# Altium PCB TC PCB.PcbDoc
Units mm, origin at the board's own origin, x right, y up, seen from the top; angles counter-clockwise.
Board outline 50 x 50 mm, 2 copper layers (Top Layer, Bottom Layer); 10 components, 16 nets, 109 pads, 0 vias.
Unrouted connection lines stored in the file: 34.
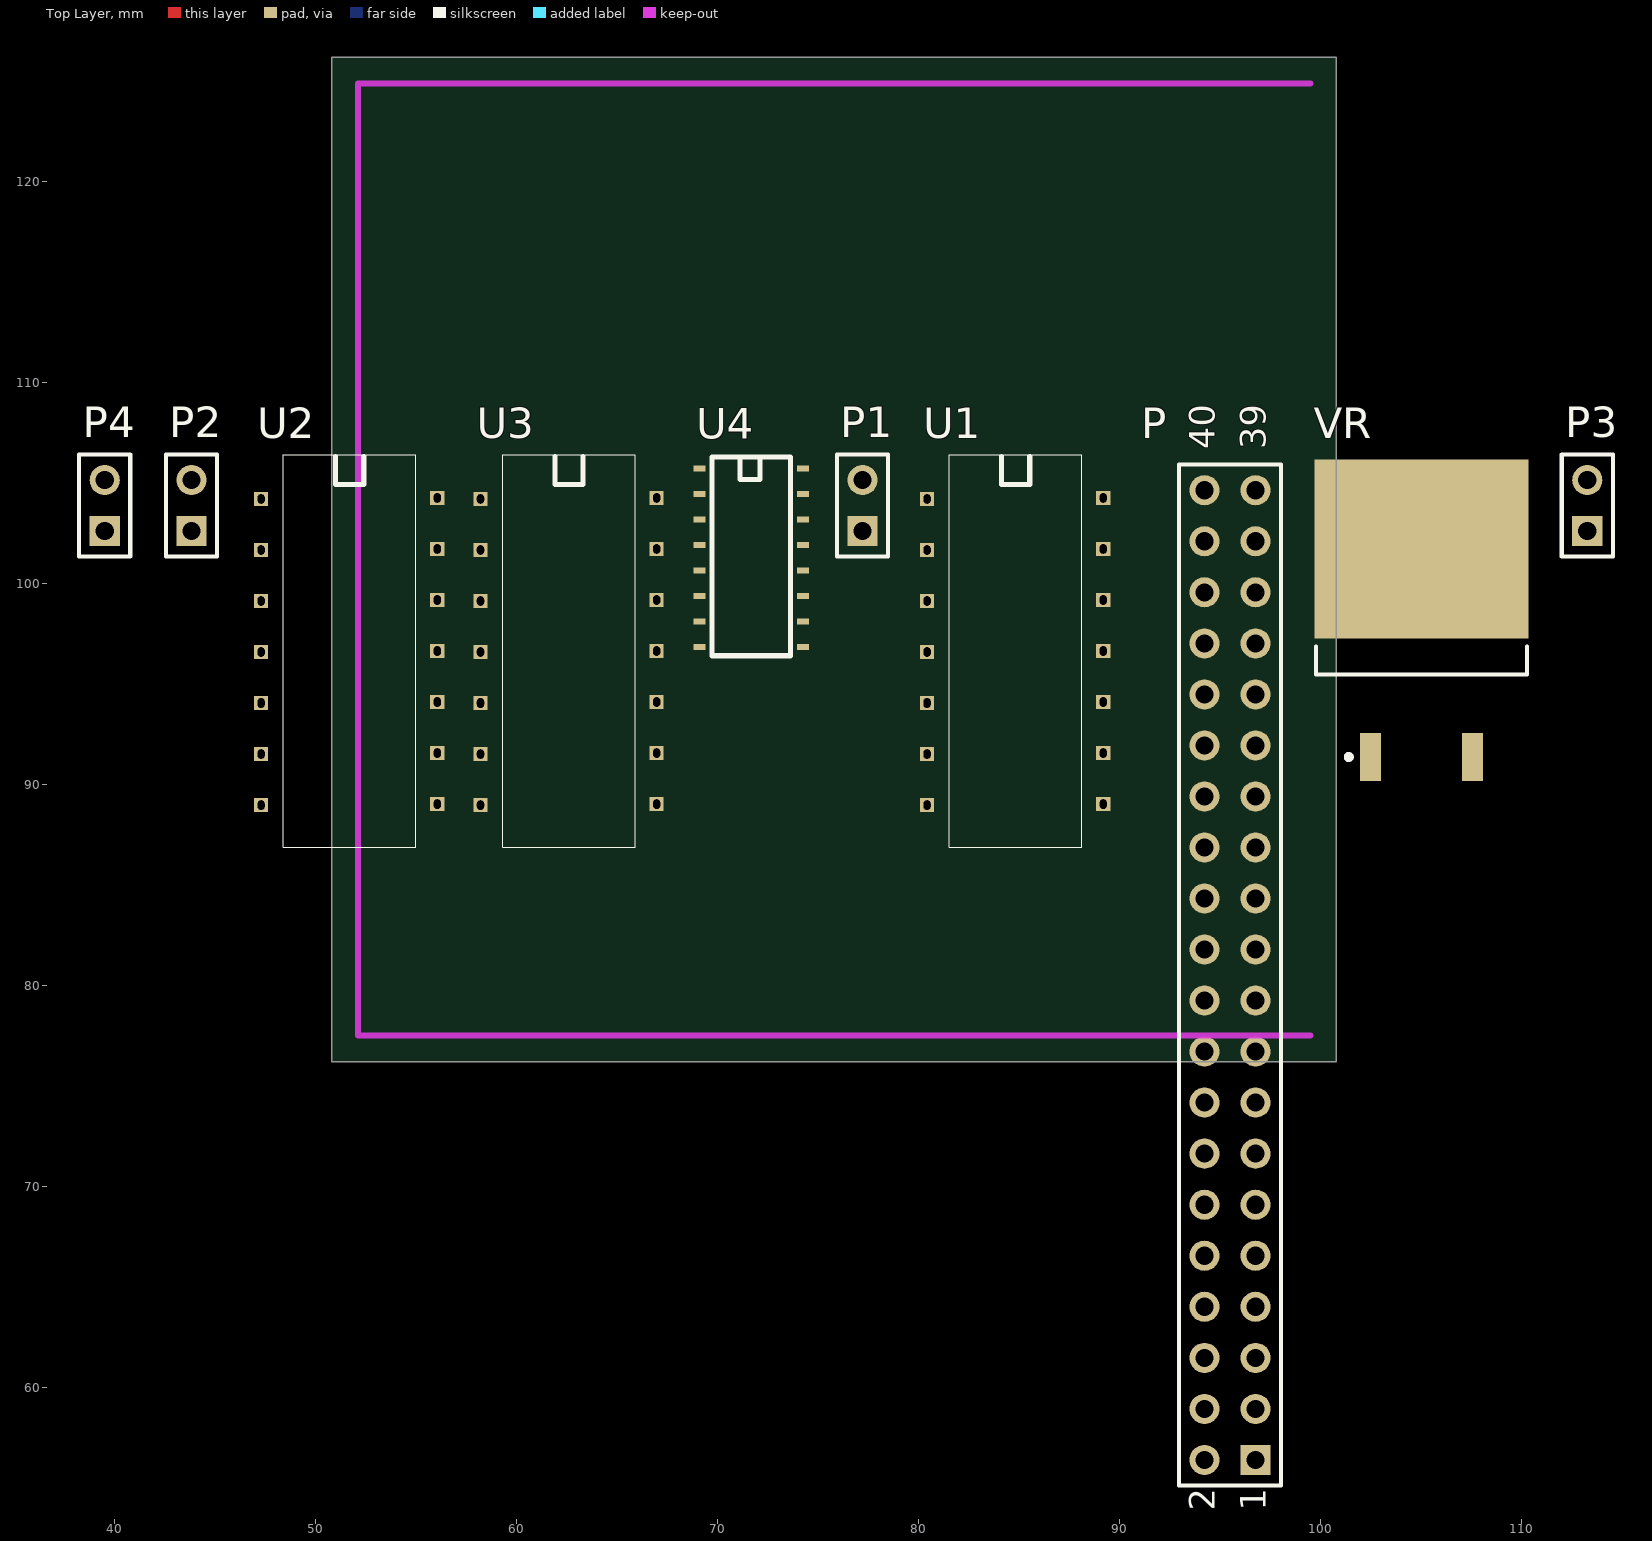
[diagram p0: Top Layer view]
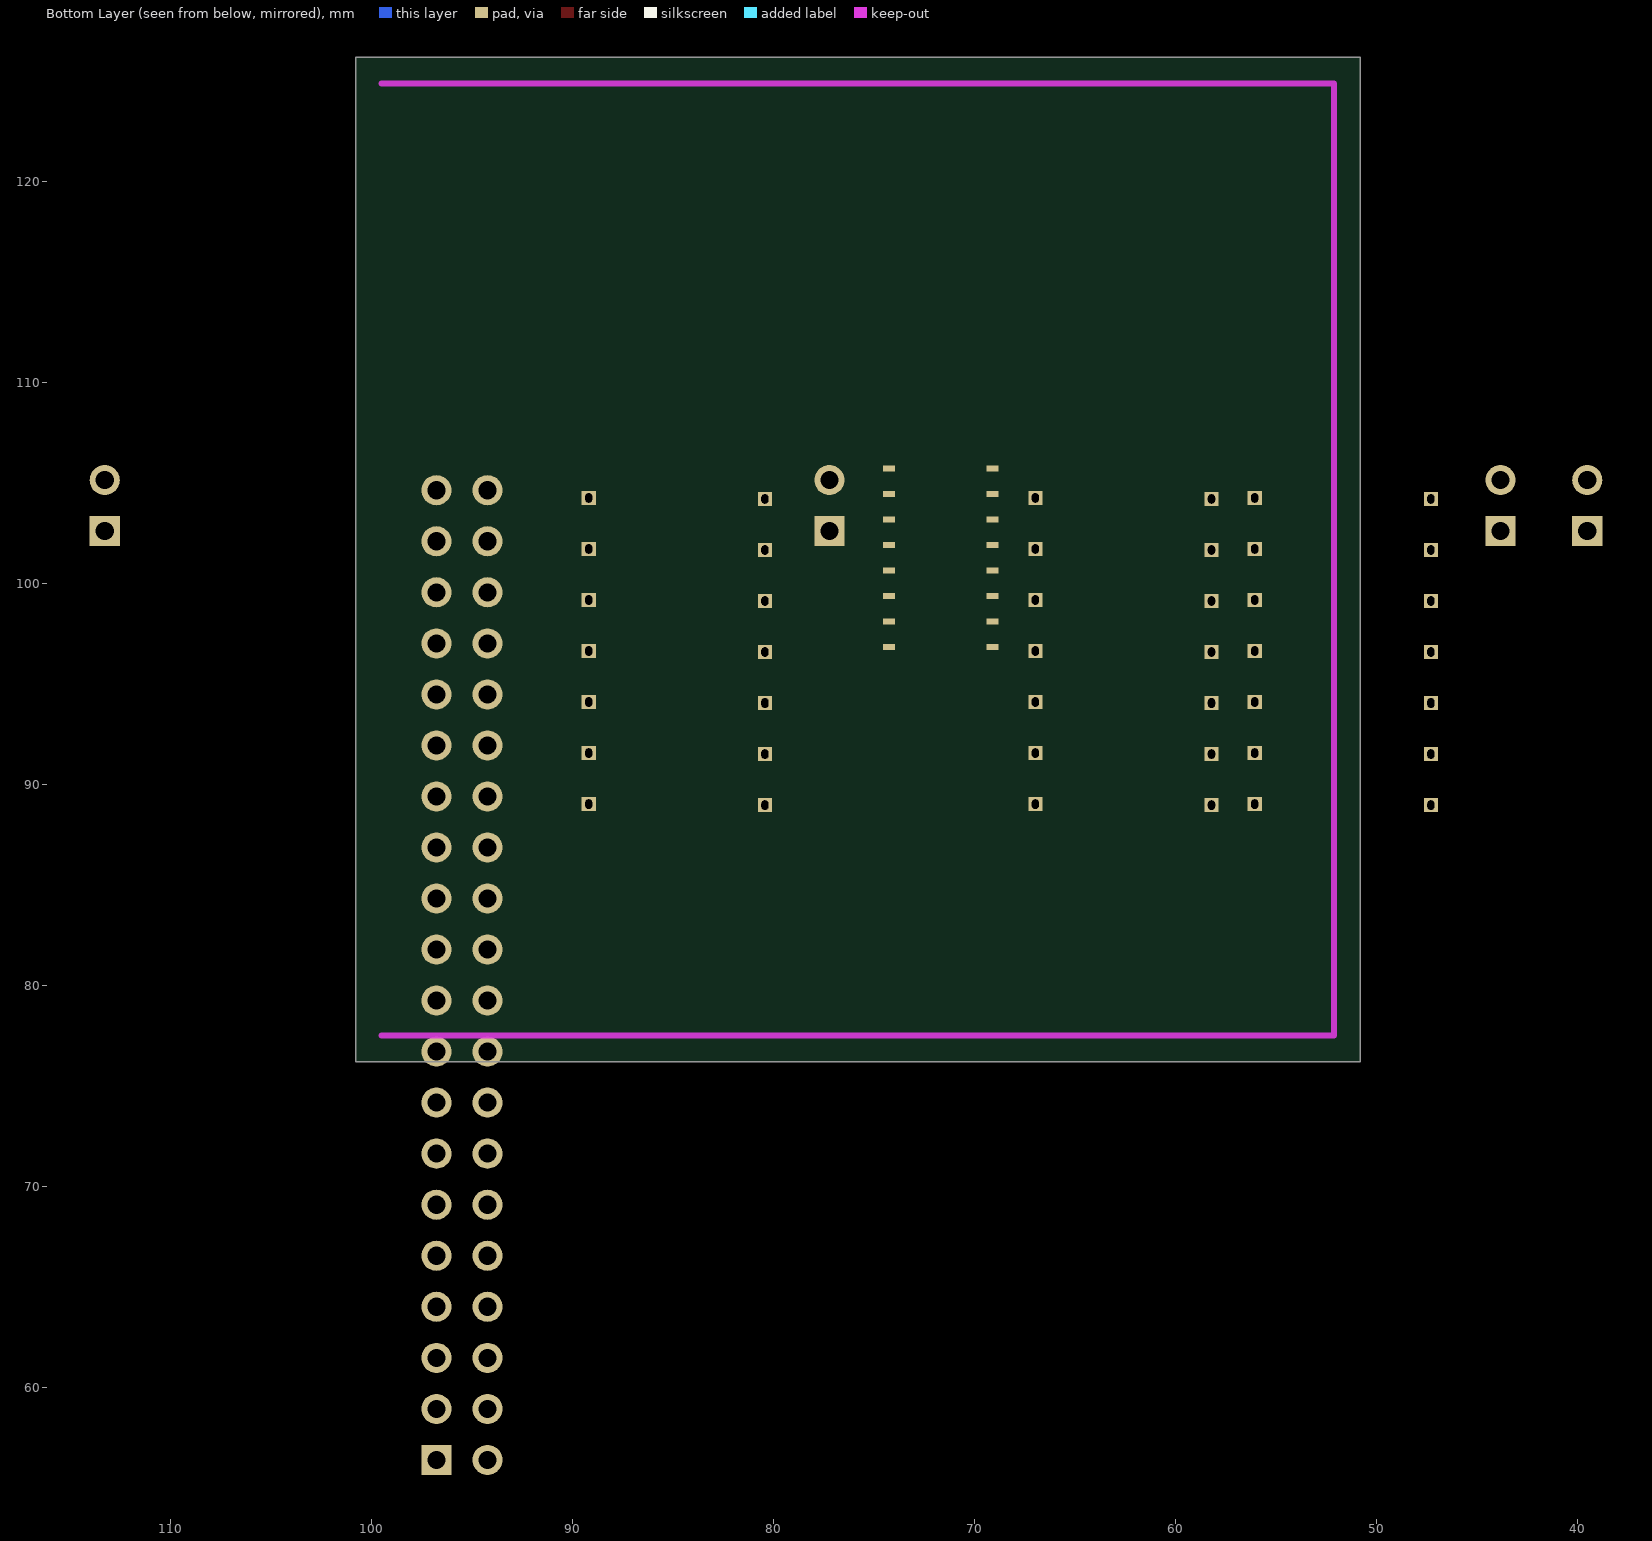
[diagram p1: Bottom Layer view, seen from below]

## Layer stack, top to bottom
Top Solder: solder mask 0.0102, Solder Resist, Dk 3.5
Top Layer: signal copper 0.0356
Dielectric 1: dielectric 0.32, FR-4, Dk 4.8
Bottom Layer: signal copper 0.0356
Bottom Solder: solder mask 0.0102, Solder Resist, Dk 3.5

## Board outline
50.8,76.2 100.8,76.2 100.8,126.2 50.8,126.2

## Design rules (kind name [scope] priority, off if disabled: settings)
Clearance [All] p1: gap=0.2
PolygonConnect [All] p1: connectstyle=Relief reliefconductorwidth=0.254 reliefentries=4 polygonreliefangle="90 Angle" airgapwidth=0.254
RoutingVias [All] p1: holewidth=0.6 width=1 viastyle="Through Hole" minholewidth=0.711 minwidth=1.27 maxholewidth=0.711 maxwidth=1.27
SolderMaskExpansion [All] p1: expansion=0.102
UnpouredPolygon [All] p1: allowunpoured=FALSE
Width [All] p1: maxlimit=0.2 minlimit=0.2 preferedwidth=0.2
29 further rules are at their usual default settings.

## Components (designator, comment, footprint, x,y, rotation, side; value= is the part's Value field where it differs from the comment)
P "Header 20X2" HDR2X20 96.774,56.388 r90 top
P1 "Header 2" HDR1X2 77.216,102.616 r90 top
P2 "Header 2" HDR1X2 43.815,102.616 r90 top
P3 "Header 2" HDR1X2 113.284,102.616 r90 top
P4 "Header 2" HDR1X2 39.497,102.616 r90 top
U1 "IC THERMOCOUPLE A W/COMP 14CDIP" "IC THERMOCOUPLE A W/COMP 14CDIP" 81.534,106.426 r0 top
U2 "IC THERMOCOUPLE A W/COMP 14CDIP" "IC THERMOCOUPLE A W/COMP 14CDIP" 48.387,106.426 r0 top
U3 "IC THERMOCOUPLE A W/COMP 14CDIP" "IC THERMOCOUPLE A W/COMP 14CDIP" 59.309,106.426 r0 top
U4 "IC ADC 10BIT 2.7V 8CH SPI 16SOIC" "IC ADC 10BIT 2.7V 8CH SPI 16SOIC" -0.381,170.18 r0 top
VR "Volt Reg" D2PAK_N 105.029,98.171 r90 top

## Footprints (in the part's own frame and the unit in brackets; to place one, negate y for a bottom-side part, rotate by r counter-clockwise, add the part's x,y. Pads: shape width x height; smd on the part's side, far side on the other; paste and mask are expansions set on the pad)
D2PAK_N [mm] "D2-PAK, 4-Leads, Body 8.8x10.4mm, Pitch 2.54mm, Lead Span 15.1mm, IPC Medium Density"
  rect 2.4x1.05 smd: 1(-6.8,2.54) 3(-6.8,-2.54)
  rect 8.9x10.65 smd: 2(3.55,0)
  silkscreen extent -6.92,-5.25 -1.3,5.25, body extent -2.7,-5.28 6.3,5.28, height 4.69
HDR1X2 [mm] "Connector; Header; 2 Position"
  rect 1.5x1.5 hole 0.9: 1(0,0)
  round 1.5 hole 0.9: 2(2.54,0)
  silkscreen extent -1.27,-1.27 3.81,1.27
HDR2X20 [mm] "Connector; Header; 20x2 Position"
  rect 1.5x1.5 hole 0.9: 1(0,0)
  round 1.5 hole 0.9: 2(0,2.54) 3(2.54,0) 4(2.54,2.54) 5(5.08,0) 6(5.08,2.54) 7(7.62,0) 8(7.62,2.54) 9(10.16,0) 10(10.16,2.54) 11(12.7,0) 12(12.7,2.54) 13(15.24,0) 14(15.24,2.54) 15(17.78,0) 16(17.78,2.54) 17(20.32,0) 18(20.32,2.54) 19(22.86,0) 20(22.86,2.54) 21(25.4,0) 22(25.4,2.54) 23(27.94,0) 24(27.94,2.54) 25(30.48,0) 26(30.48,2.54) 27(33.02,0) 28(33.02,2.54) 29(35.56,0) 30(35.56,2.54) 31(38.1,0) 32(38.1,2.54) 33(40.64,0) 34(40.64,2.54) 35(43.18,0) 36(43.18,2.54) 37(45.72,0) 38(45.72,2.54) 39(48.26,0) 40(48.26,2.54)
  silkscreen extent -1.27,-1.27 49.53,3.81
"IC ADC 10BIT 2.7V 8CH SPI 16SOIC" [mm] "MCP3008T-I/SLCT-ND"
  rect 0.6x0.31 all layers, no hole: 1(69.48,-64.45) 2(69.48,-65.72) 3(69.48,-66.99) 4(69.48,-68.26) 5(69.48,-69.53) 6(69.48,-70.8) 7(69.48,-72.07) 8(69.48,-73.34) 9(74.64,-73.34) 10(74.64,-72.07) 11(74.64,-70.8) 12(74.64,-69.53) 13(74.64,-68.26) 14(74.64,-66.99) 15(74.64,-65.72) 16(74.64,-64.45)
  silkscreen extent 70.11,-73.77 74.01,-63.87
"IC THERMOCOUPLE A W/COMP 14CDIP" [mm] "AD595AQ-ND"
  rect 0.7x0.7 hole 0.35 slot 0.465 at 90 deg: 1(-1.11,-2.21) 2(-1.11,-4.75) 3(-1.11,-7.29) 4(-1.11,-9.83) 6(-1.11,-14.91) 7(-1.11,-17.45) 8(7.66,-17.4) 9(7.66,-14.86) 10(7.66,-12.32) 11(7.66,-9.78) 12(7.66,-7.24) 13(7.66,-4.7) 14(7.66,-2.16)
  rect 0.7x0.7 hole 0.35 slot 0.485 at 90 deg: 5(-1.11,-12.37)
  silkscreen extent 0,-19.55 6.6,0

## Part data
P: "Header, 20-Pin, Dual row"
P1 P2 P3 P4: "Header, 2-Pin"
VR: "Voltage Regulator"

## Nets (pads, with @x,y where several pads share a name; then routed paths per layer and width w, separated by ;. In a path a pad name is that pad's centre, name@x,y a point inside that pad or via, vN(x,y) a via of type N, cw(c..) or ccw(c..) an arc to the next point about the centre after c; other vN are vias at no path point)
GND: P3.1 U1.4 U1.7 U1.13 U2.4 U2.7 U2.13 U3.4 U3.7 U3.13 U4.9 U4.14 U4.15 VR.2
NetP1_1: P1.1 U1.1
NetP1_2: P1.2 U1.14
NetP2_1: P2.1 U2.1
NetP2_2: P2.2 U2.14
NetP4_1: P4.1 U3.1
NetP4_2: P4.2 U3.14
NetP_8: P.8 U4.10
NetP_9: P.9 U4.12
NetP_10: P.10 U4.11
NetP_11: P.11 U4.13
NetU1_8: U1.8 U1.9 U4.1
NetU1_11: U1.11 U2.11 U3.11 U4.16 VR.3
NetU2_8: U2.8 U2.9 U4.2
NetU3_8: U3.8 U3.9 U4.3
VCC: P3.2 VR.1
pads on no net: P.1 P.2 P.3 P.4 P.5 P.6 P.7 P.12 P.13 P.14 P.15 P.16 P.17 P.18 P.19 P.20 P.21 P.22 P.23 P.24 P.25 P.26 P.27 P.28 P.29 P.30 P.31 P.32 P.33 P.34 P.35 P.36 P.37 P.38 P.39 P.40 U1.2 U1.3 U1.5 U1.6 U1.10 U1.12 U2.2 U2.3 U2.5 U2.6 U2.10 U2.12 U3.2 U3.3 U3.5 U3.6 U3.10 U3.12 U4.4 U4.5 U4.6 U4.7 U4.8

## Keep-outs
Keep-Out Layer:
  lines w0.3: 99.5,77.5 52.1,77.5 52.1,124.9 99.5,124.9

## Dimensions
52.1,77.5 to 99.5,77.5 on Mechanical 1
52.1,77.5 to 52.1,124.9 on Mechanical 1

## Text inside footprints (layer, text, board x,y; h text height)
P: Top Overlay "1" at 97.282,53.848 h1.27 r90; Top Overlay "2" at 94.742,53.848 h1.27 r90; Top Overlay "40" at 94.742,106.68 h1.27 r90; Top Overlay "39" at 97.282,106.68 h1.27 r90